# EAGLE board brushbot2.1 (EAGLE 9.4.2)
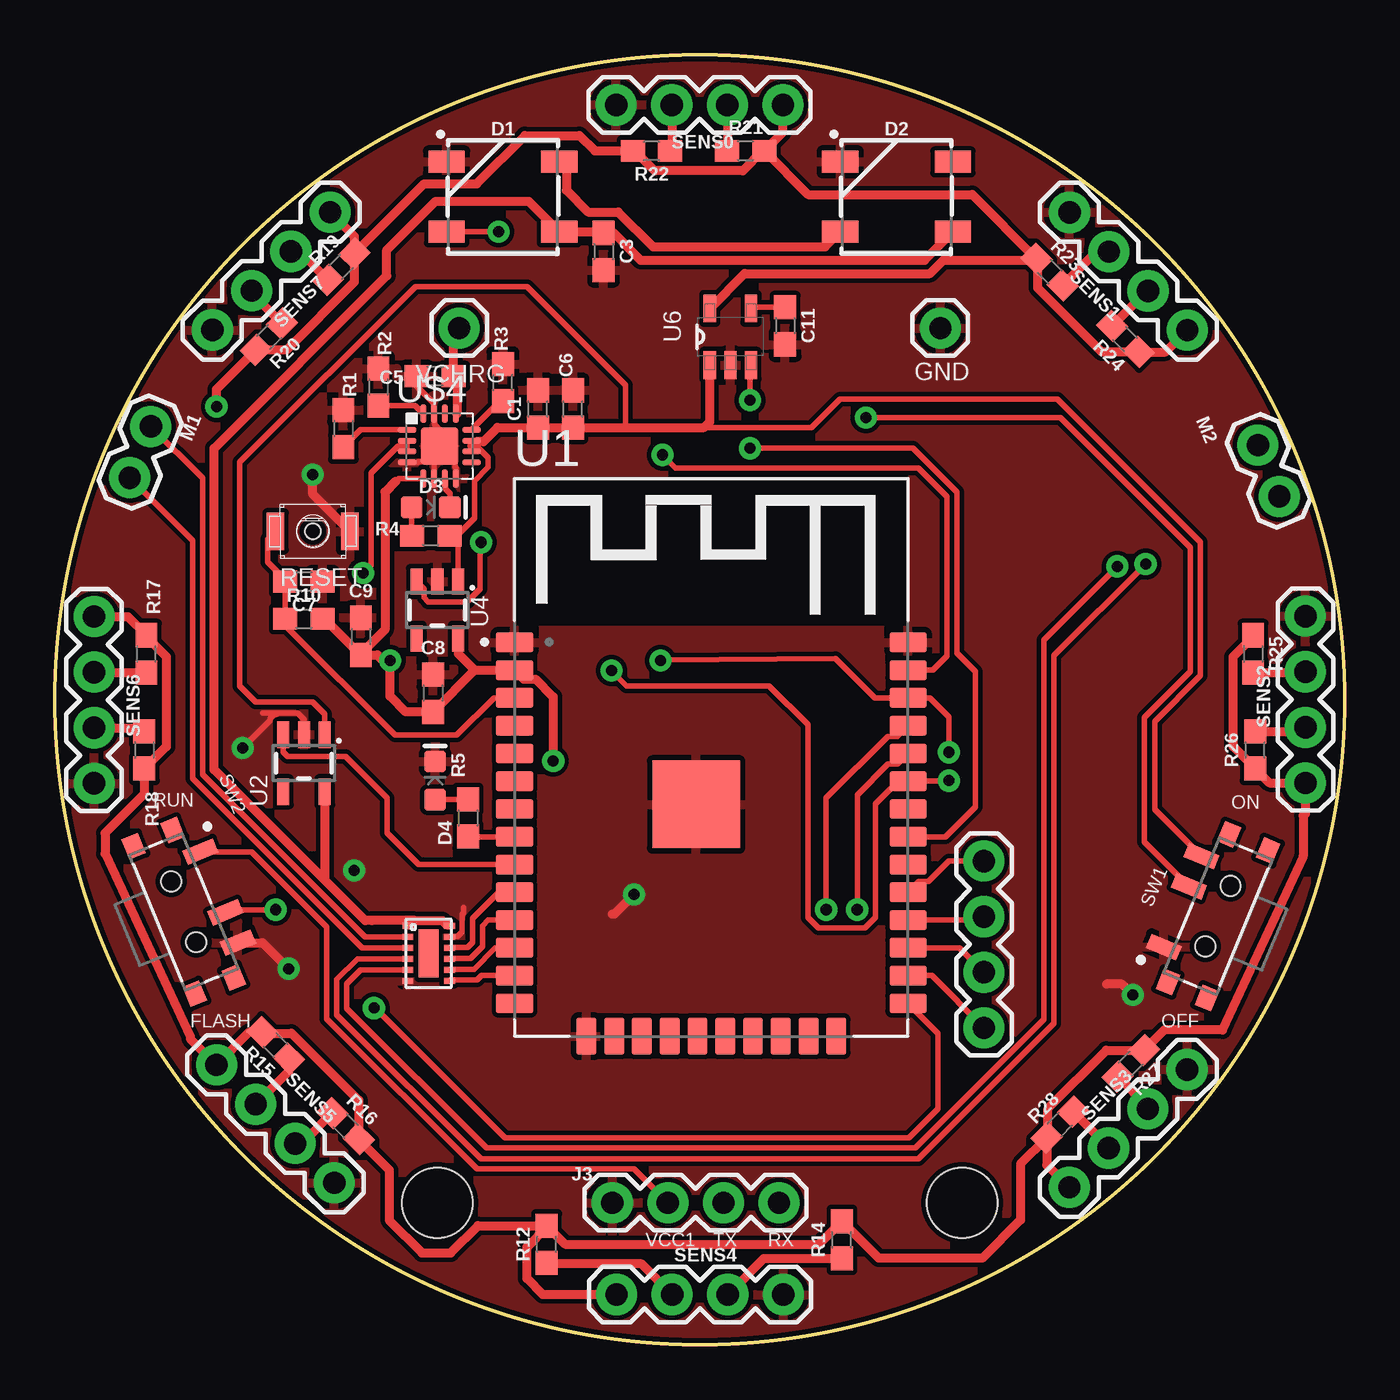
[diagram p0: board, top side]
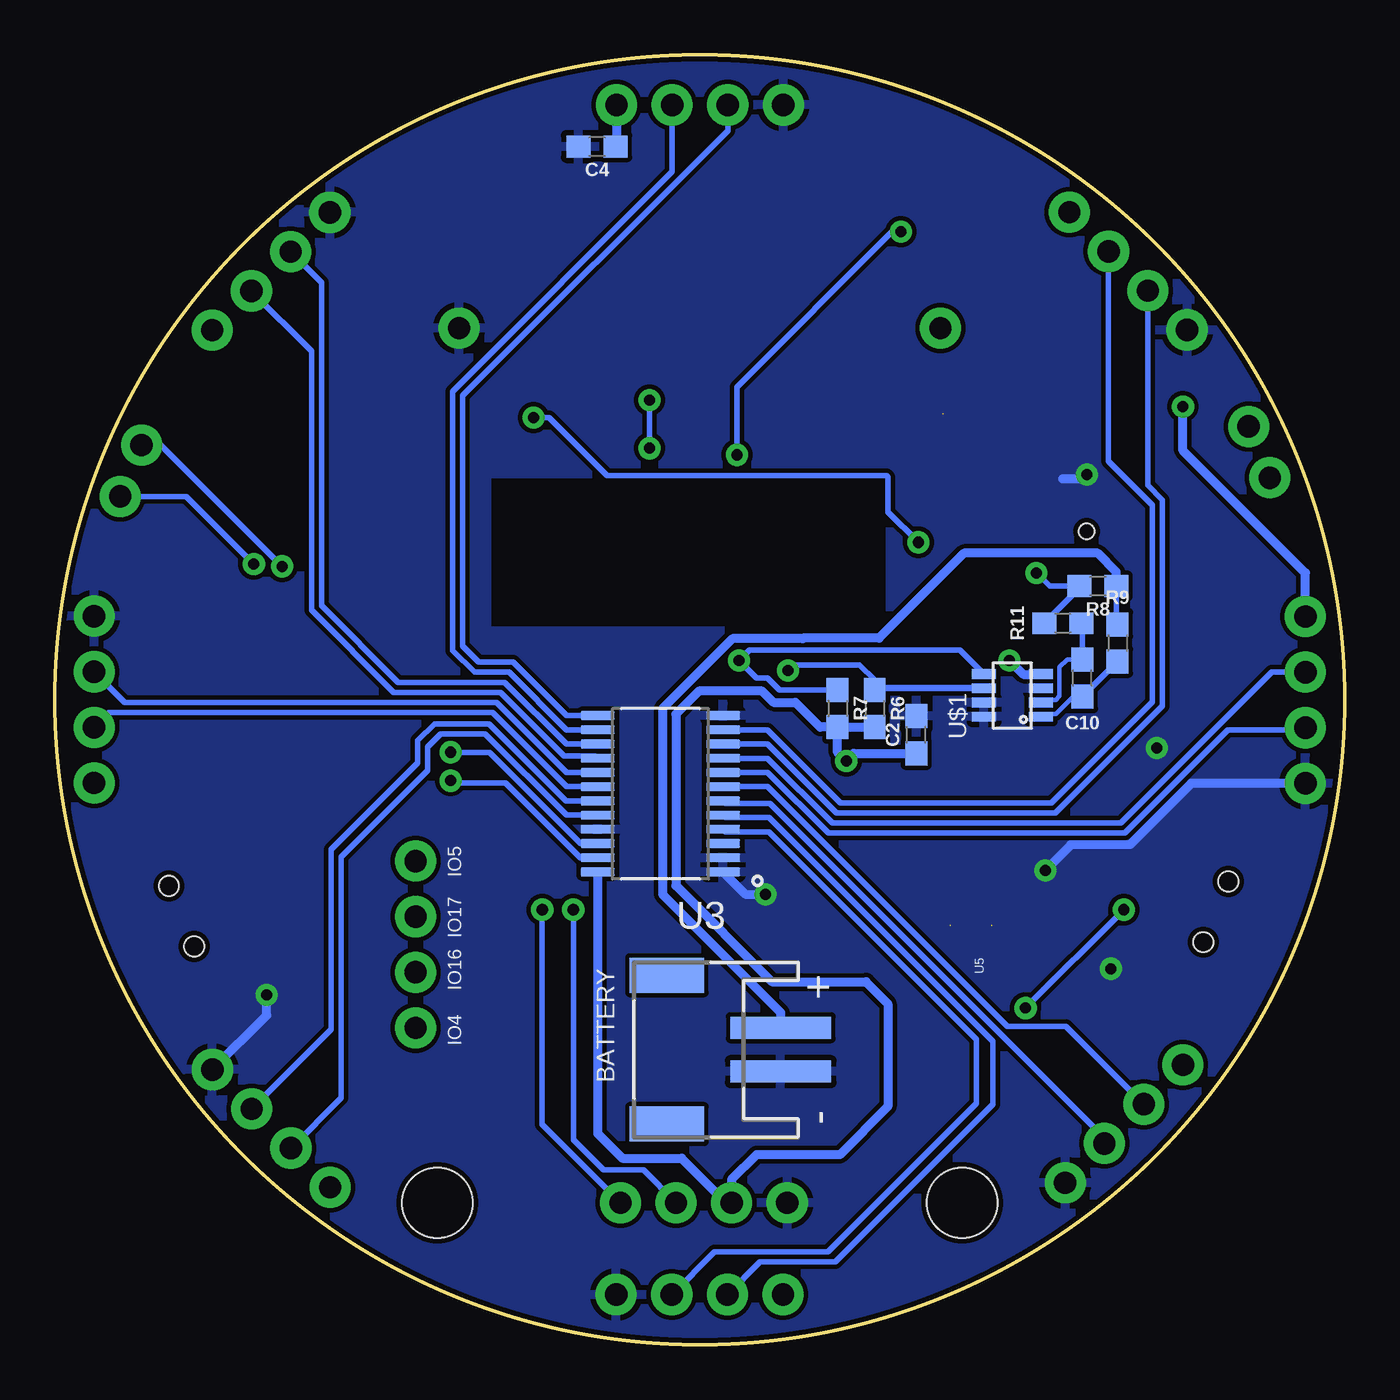
[diagram p1: board, bottom side, seen from below]

Size 59 x 59 mm. Coordinates in mm from the lower left corner, seen from the top.
Outline: circle at 29.5,29.5 radius 29.5
Copper layers (1*16): Top 0.035mm / dielectric 1.5mm / Bottom 0.035mm
Design rules "SparkFun": minimum track width 8mil, minimum drill 20mil, track to track 8mil, track to pad 8mil, pad to pad 8mil, via to via 8mil, smd to smd 8mil, copper to edge 10mil, drill to drill 8mil, minimum pad ring 12mil, minimum via ring 10mil, stop-mask expansion 4mil, vias tented up to drill 25mil, thermal gap 10mil
Holes 3.2 mm at 41.5,6.5 17.5,6.5

## Footprints (pad centres in the part's own frame; a part is rotated, then mirrored left to right if it is on the bottom)
0603 = smd 1.1 x 1: 1 -0.85,0; 2 0.85,0
JST-PH-2-SMT-RA = smd 1 x 4.6: 1 1,-3.7; 2 -1,-3.7 | smd 1.6 x 3.4: NC1 -3.4,1.5; NC2 3.4,1.5
WS2812B = smd 1.651 x 1: 1 2.577,-1.6; 2 2.577,1.6; 3 -2.577,1.6; 4 -2.577,-1.6
LED-0603 = smd 1 x 1: A -0.877,0; C 0.877,0
1X04 = drill 1.016 pad 1.88: 1 0,0; 2 2.54,0; 3 5.08,0; 4 7.62,0
1X01 = drill 1.016 pad 1.88: 1 0,0
1X02 = drill 1.016 pad 1.88: 1 0,0; 2 2.54,0
BUTTON_TACTILE_SLIM = smd 0.8 x 1.7: 1 -1.7,0; 2 1.7,0 | hole 0.7: 0,0
SW_PCM12SMTR = smd 0.7 x 1.5: 1 -2.25,1.75; 2 0.75,1.75; 3 2.25,1.75 | smd 1 x 0.8: S1 -3.65,0.965; S2 -3.65,-0.965; S3 3.65,-0.965; S4 3.65,0.965 | hole 0.9: -1.5,0; 1.5,0
MODULE_ESP-WROOM-32 = smd 1.7 x 0.9: 1 -9,8.255; 2 -9,6.985; 3 -9,5.715; 4 -9,4.445; 5 -9,3.175; 6 -9,1.905; 7 -9,0.635; 8 -9,-0.635; 9 -9,-1.905; 10 -9,-3.175; 11 -9,-4.445; 12 -9,-5.715; 13 -9,-6.985; 14 -9,-8.255; 25 9,-8.255; 26 9,-6.985; 27 9,-5.715; 28 9,-4.445; 29 9,-3.175; 30 9,-1.905; 31 9,-0.635; 32 9,0.635; 33 9,1.905; 34 9,3.175; 35 9,4.445; 36 9,5.715; 37 9,6.985; 38 9,8.255 | smd 4 x 4: 1.1 -0.7,0.845 | smd 0.9 x 1.7: 15 -5.715,-9.755; 16 -4.445,-9.755; 17 -3.175,-9.755; 18 -1.905,-9.755; 19 -0.635,-9.755; 20 0.635,-9.755; 21 1.905,-9.755; 22 3.175,-9.755; 23 4.445,-9.755; 24 5.715,-9.755
SOT23-5 = smd 0.55 x 1.2: 1 -0.95,-1.3; 2 0,-1.3; 3 0.95,-1.3; 4 0.95,1.3; 5 -0.95,1.3
SOP65P640X120-24N = smd 1.57 x 0.41: 1 -2.87,3.575; 2 -2.87,2.925; 3 -2.87,2.275; 4 -2.87,1.625; 5 -2.87,0.975; 6 -2.87,0.325; 7 -2.87,-0.325; 8 -2.87,-0.975; 9 -2.87,-1.625; 10 -2.87,-2.275; 11 -2.87,-2.925; 12 -2.87,-3.575; 13 2.87,-3.575; 14 2.87,-2.925; 15 2.87,-2.275; 16 2.87,-1.625; 17 2.87,-0.975; 18 2.87,-0.325; 19 2.87,0.325; 20 2.87,0.975; 21 2.87,1.625; 22 2.87,2.275; 23 2.87,2.925; 24 2.87,3.575
12WSON = smd 0.28 x 0.5: 1 -1.25,-0.95; 2 -0.75,-0.95; 3 -0.25,-0.95; 4 0.25,-0.95; 5 0.75,-0.95; 6 1.25,-0.95; 7 1.25,0.95; 8 0.75,0.95; 9 0.25,0.95; 10 -0.25,0.95; 11 -0.75,0.95; 12 -1.25,0.95 | smd 2.2 x 0.9: TH 0,0
SOT95P280X145-5N = smd 1.27 x 0.559: 1 -1.295,0.94; 2 -1.295,0; 3 -1.295,-0.94; 4 1.295,-0.94; 5 1.295,0.94
SOT-23-8 = smd 0.45 x 1.1: 1 -0.975,-1.3; 2 -0.325,-1.3; 3 0.325,-1.3; 4 0.975,-1.3; 5 0.975,1.3; 6 0.325,1.3; 7 -0.325,1.3; 8 -0.975,1.3
QFN16 = smd 0.85 x 0.28: 1 -1.475,0.75; 2 -1.475,0.25; 3 -1.475,-0.25; 4 -1.475,-0.75; 9 1.475,-0.75; 10 1.475,-0.25; 11 1.475,0.25; 12 1.475,0.75 | smd 0.28 x 0.85: 5 -0.75,-1.475; 6 -0.25,-1.475; 7 0.25,-1.475; 8 0.75,-1.475; 13 0.75,1.475; 14 0.25,1.475; 15 -0.25,1.475; 16 -0.75,1.475 | smd 1.7 x 1.7: TH 0,0

## Placement (x,y rotation side)
C1  1.0uF  [0603]  22.1,42.8 90 top
C2  1.0uF  [0603]  19.6,27.9 90 bottom
C3  1.0uF  [0603]  25.1,50 270 top
C4  10uF  [0603]  34.2,54.8 180 bottom
C5  1.0uF  [0603]  17.4,44.3 180 top
C6  4.7uF  [0603]  23.7,42.8 90 top
C7  0.1uF  [0603]  11.4,34.9 180 top
C8  0.1uF  [0603]  17.3,29.8 270 top
C9  0.1uF  [0603]  14,32.4 270 top
C10  0.1uF  [0603]  12,30.5 90 bottom
C11  10nF  [0603]  33.4,46.6 270 top
CN1  [JST-PH-2-SMT-RA]  29.5,13.5 90 bottom
D1  WS2812B  [WS2812B]  20.5,52.5 0 top
D2  WS2812B  [WS2812B]  38.5,52.5 0 top
D3  RED  [LED-0603]  17.2,38.3 0 top
D4  RED  [LED-0603]  17.4,25.8 90 top
FRAME2  FRAME-LEDGER  [CREATIVE_COMMONS]  -41.5,-31.5 0 top  (outside the outline)
J3  [1X04]  25.5,6.5 0 top
J4  [1X01]  18.5,46.5 0 top
J5  [1X01]  40.5,46.5 0 top
J12  [1X04]  42.5,14.5 90 top
M1  [1X02]  4.4,42 247.5 top
M2  [1X02]  56,38.8 112.5 top
R1  10k  [0603]  13.2,41.9 270 top
R2  1.8k  [0603]  14.8,43.8 270 top
R3  1k  [0603]  20.5,44 90 top
R4  1k  [0603]  17.2,37 0 top
R5  47k  [0603]  18.9,24.1 270 top
R6  4.7k  [0603]  21.5,29.1 270 bottom
R7  4.7k  [0603]  23.2,29.1 270 bottom
R8  0.05  [0603]  11.3,34.7 180 bottom
R9  10  [0603]  10.4,32.1 270 bottom
R10  10k  [0603]  11.4,33.2 0 top
R11  10  [0603]  12.9,33 0 bottom
R12  4.7k  [0603]  22.5,4.6 90 top
R14  4.7k  [0603]  36,4.8 90 top
R15  4.7k  [0603]  10.1,13.7 135 top
R16  4.7k  [0603]  13.3,10 315 top
R17  4.7k  [0603]  4.2,31.6 90 top
R18  4.7k  [0603]  4.1,27.2 270 top
R19  4.7k  [0603]  13.1,49.3 45 top
R20  4.7k  [0603]  9.8,46.1 225 top
R21  4.7k  [0603]  31.6,54.6 0 top
R22  4.7k  [0603]  27.3,54.6 180 top
R23  4.7k  [0603]  45.5,49.06 315 top
R24  4.7k  [0603]  48.96,46 135 top
R25  4.7k  [0603]  54.8,31.6 270 top
R26  4.7k  [0603]  54.9,27.2 90 top
R27  4.7k  [0603]  49.21,12.87 225 top
R28  4.7k  [0603]  45.97,10.07 45 top
RST_BUTTON  BUTTON_TACTILE_SLIM  [BUTTON_TACTILE_SLIM]  11.8,37.2 0 top
SENS0  [1X04]  33.3,56.7 180 top
SENS1  [1X04]  51.8,46.4 135 top
SENS2  [1X04]  57.2,25.7 90 top
SENS3  [1X04]  46.4,7.2 45 top
SENS4  [1X04]  25.7,2.3 0 top
SENS5  [1X04]  7.4,12.8 315 top
SENS6  [1X04]  1.8,33.3 270 top
SENS7  [1X04]  12.6,51.8 225 top
SW1  PCM12SMTR  [SW_PCM12SMTR]  53.2,19.6 67.5 top
SW2  PCM12SMTR  [SW_PCM12SMTR]  5.9,19.8 292.5 top
U1  ESP-WROOM-32  [MODULE_ESP-WROOM-32]  30.03,23.87 0 top
U2  3.3V  [SOT23-5]  11.4,26.6 180 top
U3  TCA9548APWR  [SOP65P640X120-24N]  31.3,25.2 180 bottom
U4  3.3V  [SOT23-5]  17.5,33.6 180 top
U5  DRV8836  [12WSON]  17.1,17.9 270 top
U6  TPS79328DBVR  [SOT95P280X145-5N]  30.9,46.1 90 top
U$1  INA219  [SOT-23-8]  15.2,29.7 90 bottom
U$4  BQ24075  [QFN16]  17.6,41.1 0 top

## Library data of the parts
C1-C3 C5 = SparkFun-Capacitors; PROD_ID: CAP-00868
C4 = SparkFun-Capacitors; PROD_ID: CAP-11015
C6 = SparkFun-Capacitors; PROD_ID: CAP-08280
C7-C10 = SparkFun-Capacitors; PROD_ID: CAP-00810
C11 = SparkFun-Capacitors; PROD_ID: CAP-00867
CN1 = adafruit
D1 D2 = SparkFun-LED; PROD_ID: DIO-12503
D3 D4 = SparkFun-LED; PROD_ID: DIO-00819
FRAME2 RST_BUTTON U$1 = GRITSBot
J3 J12 SENS0 SENS1-SENS7 = SparkFun-Connectors; PROD_ID: CONN-09696
J4 J5 M1 M2 = SparkFun-Connectors
R1 R10 = SparkFun-Resistors; PROD_ID: RES-00824
R2 = SparkFun-Resistors; PROD_ID: RES-09119
R3 R4 = SparkFun-Resistors; PROD_ID: RES-07856
R5 = SparkFun-Resistors; PROD_ID: RES-07871
R6 R7 R12 R14-R28 = SparkFun-Resistors; PROD_ID: RES-07857
R8 = SparkFun-Resistors; PROD_ID: RES-12535
R9 R11 = SparkFun-Resistors; PROD_ID: RES-12581
SW1 SW2 = PCM12SMTR; AVAILABILITY: Unavailable; DESCRIPTION: Switch Slide ON ON SPDT Side Slide 0.3A 6VDC 10000Cycles Gull Wing SMD T/R; MF: C&K; MP: PCM12SMTR; PACKAGE: DO-201 C&amp;K Components; PRICE: None
U1 = ESP-WROOM-32; DESCRIPTION: Module: combo; GPIO, I2C x2, I2S x2, SDIO, SPI x3, UART x3; 19.5dBm; DIGI-KEY_PART_NUMBER: 1188-1178-ND; DIGI-KEY_PURCHASE_URL: https://www.digikey.com/product-detail/en/olimex-ltd/ESP-WROOM-32/1188-1178-ND/6580750?utm_source=snapeda&utm_medium=aggregator&utm_campaign=symbol; MF: Olimex LTD; MP: ESP-WROOM-32; PACKAGE: Module Olimex LTD
U2 U4 = SparkFun-IC-Power; PROD_ID: VREG-12457
U3 = TCA9548APWR; AVAILABILITY: Unavailable; DESCRIPTION: Low-Voltage 8-Channel I2C Switch With Reset 24-TSSOP -40 to 85; MF: Texas Instruments; MP: TCA9548APWR; PACKAGE: TSSOP-24 Texas Instruments; PRICE: None
U5 = balto
U6 = TPS79328DBVR; AVAILABILITY: Unavailable; DESCRIPTION: Single Output LDO, 200mA, Fixed_2.8V_, High PSRR, Low Noise 5-SOT-23 -40 to 125; MF: Texas Instruments; MP: TPS79328DBVR; PACKAGE: SOT-23-5 Texas Instruments; PRICE: None
U$4 = TI-bq24075

## Nets
26: J12.1 U1.26
27: J12.2 U1.27
28: J12.3 U1.28
29: J12.4 U1.29
AIN1: U1.10 U5.10
AIN2: U1.11 U5.9
BIN1: U1.12 U5.8
BIN2: U1.13 U5.7
GND: C1.2 C2.2 C3.2 C4.2 C5.2 C6.2 C7.1 C8.1 C9.1 C11.2 CN1.2 D1.3 D2.3 D4.C J3.1 J5.1 R1.1 R2.1 R3.2 RST_BUTTON.2 SENS0.4 SENS1.4 SENS2.4 SENS3.4 SENS4.4 SENS5.4 SENS6.4 SENS7.4 SW1.1 SW2.3 U1.1 U1.1.1 U1.15 U1.38 U2.2 U3.1 U3.2 U3.12 U3.21 U4.2 U5.6 U5.11 U6.2 U$1.3 U$1.7 U$1.8 U$4.4 U$4.6 U$4.8 U$4.15 U$4.TH
GPIO0: SW2.2 U1.25
LED1OUT: D1.2 D2.4
LEDS: D1.4 U1.37
M1+: M1.1 U5.2
M1-: M1.2 U5.3
M2+: M2.1 U5.4
M2-: M2.2 U5.5
MOTOR_EN: U1.9 U2.3
N$1: R1.2 U$4.1
N$2: SW1.2 U4.3
N$3: R2.2 U$4.16
N$4: R3.1 U$4.12
N$5: C10.1 R9.2 U$1.1
N$7: D3.C U$4.7
N$8: D3.A R4.1
N$9: R5.2 U1.8
N$10: D4.A R5.1
N$11: C10.2 R11.2 U$1.2
N$12: CN1.1 R8.1 R9.1
N$14: C11.1 U6.4
N$15: U3.3
OLD_MOTOR_EN: U1.30
RESET: C7.2 R10.1 RST_BUTTON.1 U1.3
SCL1: R7.1 U1.36 U3.22 U$1.5
SCL1_0: R21.1 SENS0.2 U3.14
SCL1_1: R24.2 SENS1.2 U3.16
SCL1_2: R26.2 SENS2.2 U3.18
SCL1_3: R28.2 SENS3.2 U3.20
SCL1_4: R12.1 SENS4.2 U3.5
SCL1_5: R15.1 SENS5.2 U3.7
SCL1_6: R17.1 SENS6.2 U3.9
SCL1_7: R19.1 SENS7.2 U3.11
SDA1: R6.1 U1.33 U3.23 U$1.6
SDA1_0: R22.1 SENS0.3 U3.13
SDA1_1: R23.2 SENS1.3 U3.15
SDA1_2: R25.2 SENS2.3 U3.17
SDA1_3: R27.2 SENS3.3 U3.19
SDA1_4: R14.1 SENS4.3 U3.4
SDA1_5: R16.1 SENS5.3 U3.6
SDA1_6: R18.1 SENS6.3 U3.8
SDA1_7: R20.1 SENS7.3 U3.10
SENS_EN: U1.31 U6.3
U0RX: J3.4 U1.34
U0TX: J3.3 U1.35
V_SUP: C1.1 C6.1 R4.2 SW1.3 U2.1 U4.1 U6.1 U$4.10 U$4.11
VBAT: R8.2 R11.1 U$4.2 U$4.3
VCC1: C2.1 C8.2 C9.2 J3.2 R6.2 R7.2 R10.2 SW2.1 U1.2 U3.24 U4.5 U$1.4 U$4.5
VCC2: C3.1 D1.1 D2.1 U2.5 U5.1 U5.12
VCC3: C4.1 R12.2 R14.2 R15.2 R16.2 R17.2 R18.2 R19.2 R20.2 R21.2 R22.2 R23.1 R24.1 R25.1 R26.1 R27.1 R28.1 SENS0.1 SENS1.1 SENS2.1 SENS3.1 SENS4.1 SENS5.1 SENS6.1 SENS7.1 U6.5
VCHRG: C5.1 J4.1 U$4.13

## Tracks (layer width: path | path; a pad name or v marks a point on that pad's centre or on a via)
26
  Top 0.254: U1.26 40.12,16.88 J12.1
27
  Top 0.254: U1.27 41.38,18.16 J12.2
28
  Top 0.254: U1.28 42.34,19.42 J12.3
29
  Top 0.254: U1.29 39.52,21.19 39.96,21.19 40.89,22.12 J12.4
AIN1
  Top 0.254: U5.10 18.08,18.18 18.88,18.18 19.1,18.4 19.1,19.5 20.3,20.7 U1.10
AIN2
  Top 0.254: U5.9 18.08,17.68 19.03,17.68 19.56,18.21 19.56,19.16 19.83,19.42 U1.11 20.52,19.42
BIN1
  Top 0.254: U5.8 18.08,17.18 19.17,17.18 20.15,18.16 U1.12
BIN2
  Top 0.254: U1.13 19.52,16.88 19.32,16.68 18.08,16.68 U5.7
GND  (via drill 0.51)
  Top 0.254: U$4.4 16.6,40.35 16.63,40.38 16.88,40.38 17.35,40.85 | U$4.6 17.35,40.85 | 17.35,40.85 17.5,41 | 17.5,41 U$4.TH 18.32,40.38 18.32,40.13 18.35,40.1 U$4.8 | 17.5,41 17.5,41.95 17.38,42.08 17.38,42.55 U$4.15 17.32,42.6 17.32,43.08 16.55,43.84 C5.2 | U2.2 11.4,28.6 11.1,28.9 10.2,28.9 | 10.2,28.9 9.5,28.9 | U5.11 18.08,18.68 18.44,18.68 18.64,18.89 18.64,19.69 18.7,19.75 18.7,20 | 10.2,28.9 10.13,28.83 10.04,28.83 9.84,28.64 9.84,28.55 v8.6,27.3
  Top 0.406: v26.5,20.6 25.6,19.7 25.5,19.7 | RST_BUTTON.2 11.8,38.9 v11.8,39.8 | v49.3,16 48.8,16.5 48.1,16.5 | SW2.3 9.51,18.39 v10.7,17.2
  Bottom 0.406: U3.1 27.41,20.6 v26.5,20.6 | v11.8,39.8 12,39.6 12.9,39.6 | SENS3.4 49.3,15.08 v49.3,16 | SENS6.4 7.03,25.68 9.84,22.87 12.54,22.87 v13.7,21.7
  pour Top: -8.5,60.5 69.5,60.5 69.5,-3.5 -9.5,-3.5 -9.5,60.5
  pour Bottom: -9.5,60.5 69.5,60.5 69.5,-3.5 -9.5,-3.5
GPIO0  (via drill 0.51)
  Top 0.254: U1.25 40.4,14.25 40.4,10.8 39.06,9.46 20.6,9.46 14.66,15.4 v14.6,15.4 | v10.1,19.9 7.93,19.9 SW2.2
  Bottom 0.254: v14.6,15.4 v10.1,19.9
LED1OUT
  Top 0.406: D1.2 23.4,53.78 23.4,52.8 24.39,51.81 25.77,51.81 27.37,50.21 35.23,50.21 D2.4
LEDS  (via drill 0.51)
  Top 0.254: U1.37 40.16,30.85 40.8,31.5 40.8,38.8 39.5,40.1 28.4,40.1 v27.8,40.7 | v20.3,50.9 D1.4
  Bottom 0.254: v27.8,40.7 27.8,43.8 20.7,50.9 v20.3,50.9
M1+
  Top 0.254: U5.2 14.2,18.65 6.76,26.09 6.76,39.64 M1.1
M1-
  Top 0.254: U5.3 14.05,18.15 6.3,25.9 6.3,36.78 M1.2
M2+  (via drill 0.51)
  Top 0.254: U5.4 13.85,17.65 12.9,16.7 12.9,15.1 19.5,8.5 39.5,8.5 45.7,14.7 45.7,31.52 v49.89,35.71
  Bottom 0.254: v49.89,35.71 52.98,38.8 M2.1
M2-  (via drill 0.51)
  Top 0.254: v48.6,35.6 45.24,32.24 45.24,14.89 39.35,9 19.75,9 13.36,15.39 13.36,16.51 14,17.15 U5.5
  Bottom 0.254: v48.6,35.6 54.15,41.15 M2.2
MOTOR_EN
  Top 0.254: U1.9 16.63,21.97 15.2,23.4 15.2,25 13.3,26.9 10.65,26.9 10.45,27.1 U2.3
N$1
  Top 0.254: U$4.1 14,41.85 R1.2
N$2  (via drill 0.51)
  Top 0.254: U4.3 16.9,34.55 16.9,34.16 17.09,33.97 18.86,33.97 19.45,34.56 19.45,36.66 v19.5,36.7 | v37.1,42.4 46,42.4 51.94,36.46 51.94,30.79 49.84,28.69 49.84,22.99 SW1.2
  Bottom 0.254: v19.5,36.7 20.89,38.09 20.89,39.67 20.97,39.75 33.75,39.75 36.4,42.4 v37.1,42.4
N$3
  Top 0.254: R2.2 16.48,42.95 U$4.16
N$4
  Top 0.254: U$4.12 20.38,43.15 R3.1
N$5
  Bottom 0.203: U$1.1 13.78,28.84 13.22,28.84 12.42,29.65 C10.1
  Bottom 0.254: C10.1 R9.2
N$7
  Top 0.254: 17.85,39.53 U$4.7 17.88,39.59 17.88,39.12 18.08,38.93 D3.C
N$8
  Top 0.254: D3.A 16.32,37.03 R4.1
N$9
  Top 0.254: U1.8 18.91,23.23 R5.2
N$10
  Top 0.254: D4.A 17.43,24.95 R5.1
N$11
  Bottom 0.203: U$1.2 13.78,29.49 13.22,29.49 13.05,29.67 13.05,31 12.7,31.35 C10.2
  Bottom 0.254: R11.2 12,32.95 C10.2
N$12
  Bottom 0.254: R9.1 10.45,32.95 R8.1
  Bottom 0.406: R8.1 10.45,35.35 11.3,36.2 17.41,36.2 21.3,32.31 24.78,32.31 24.79,32.3 28,32.3 31.2,29.1 31.2,20.6 25.8,15.2 CN1.1
N$14
  Top 0.254: U6.4 31.89,47.45 C11.1
RESET
  Top 0.254: RST_BUTTON.1 9.75,36.85 9.75,35.8 10.55,35 C7.2 R10.1 10.55,32.9 15.57,27.88 18.38,27.88 20.09,29.59 U1.3
SCL1  (via drill 0.51)
  Top 0.254: v40.9,27.1 40.9,28.7 40.02,29.59 U1.36 37.52,29.59 35.71,31.39 27.72,31.32 v27.7,31.3
  Bottom 0.254: v40.9,27.1 39.12,27.1 34.95,22.92 U3.22 | U$1.5 17.6,31.77 27.23,31.77 v27.7,31.3 26.9,30.5 26.4,30.5 25.85,29.95 R7.1
SCL1_0
  Top 0.406: SENS0.2 R21.1
  Bottom 0.254: U3.14 35.6,28.12 38.23,30.76 39.8,30.76 40.8,31.76 40.8,33.33 40.8,33.6 40.8,43.6 30.76,53.64 SENS0.2
SCL1_1
  Top 0.406: R24.2 49.95,48.2 SENS1.2
  Bottom 0.254: U3.16 34.28,26.94 35.71,26.94 38.61,29.84 43.49,29.84 47.26,33.61 47.26,45.45 SENS1.2
SCL1_2
  Top 0.406: R26.2 57.01,28.05 SENS2.2
  Bottom 0.254: U3.18 35.59,25.52 38.98,28.92 56.52,28.92 SENS2.2
SCL1_3
  Top 0.406: R28.2 48.2,9.05 SENS3.2
  Bottom 0.254: SENS3.2 45.9,11.3 45.9,22.3 41.94,26.26 41.94,27.35 41.35,27.94 39.31,27.94 35.6,24.23 U3.20
SCL1_4
  Top 0.254: 22.35,3.6 R12.1
  Top 0.406: SENS4.2 26.84,3.7 22.55,3.7 R12.1
  Bottom 0.254: U3.5 28.31,24.11 26.34,24.11 16.1,13.87 16.1,11 23.3,3.8 26.74,3.8 SENS4.2
SCL1_5
  Top 0.406: R15.1 10.7,12.51 SENS5.2
  Bottom 0.254: U3.7 26.4,25.52 15.43,14.56 12.75,14.56 SENS5.2
SCL1_6
  Top 0.406: SENS6.2 R17.1
  Bottom 0.254: U3.9 26.4,26.83 23.43,23.85 10.25,23.85 3.35,30.76 SENS6.2
SCL1_7
  Top 0.406: R19.1 11.19,50 SENS7.2
  Bottom 0.254: U3.11 26.41,28.12 23.05,24.77 13.43,24.77 8.8,29.4 8.8,38.4 10.8,40.4 SENS7.2
SDA1  (via drill 0.51)
  Top 0.254: v40.9,25.8 40.88,25.77 U1.33 38.58,25.77 37.54,24.74 37.54,19.55 37.05,19.06 34.93,19.06 34.44,19.55 34.44,28.37 32.67,30.14 26.16,30.14 v25.46,30.84
  Bottom 0.254: v40.9,25.8 40.8,25.7 38.37,25.7 34.95,22.27 U3.23 | R6.1 21.5,29.9 | R6.1 21.5,30.04 | R6.1 21.5,30.4 22.2,31.1 25.2,31.1 v25.46,30.84
  Bottom 0.305: U$1.6 16.51,30.04 21.5,30.04
SDA1_0
  Top 0.406: SENS0.3 28.22,54.67 R22.1
  Bottom 0.254: SENS0.3 28.22,55.53 40.34,43.41 40.34,33.8 40.34,33.6 40.34,31.95 39.61,31.21 38.04,31.21 35.6,28.77 U3.13
SDA1_1
  Top 0.406: R23.2 47.64,49.99 SENS1.3
  Bottom 0.254: U3.15 35.6,27.48 38.42,30.3 43.3,30.3 46.8,33.8 46.8,48.58 SENS1.3
SDA1_2
  Top 0.406: R25.2 57.17,30.75 SENS2.3
  Bottom 0.254: U3.17 35.59,26.17 38.79,29.38 55.8,29.38 SENS2.3
SDA1_3
  Top 0.406: R27.2 49.99,10.89 SENS3.3
  Bottom 0.254: SENS3.3 46.35,14.43 46.35,22.65 42.4,26.6 42.4,27.64 41.64,28.4 39.12,28.4 35.6,24.88 U3.19
SDA1_4
  Top 0.406: SENS4.3 32.43,3.95 R14.1
  Bottom 0.254: U3.4 28.31,23.46 26.34,23.46 16.86,13.98 16.86,11.04 23.64,4.26 28.82,4.26 SENS4.3
SDA1_5
  Top 0.406: R16.1 11.31,9.21 SENS5.3
  Bottom 0.254: U3.6 28.31,24.76 26.28,24.76 10.99,9.47 SENS5.3
SDA1_6
  Top 0.406: SENS6.3 3.93,28.22 R18.1
  Bottom 0.254: U3.8 26.4,26.17 23.62,23.4 10.06,23.4 5.34,28.12 1.9,28.12 SENS6.3
SDA1_7
  Top 0.406: R20.1 9.01,48.09 SENS7.3
  Bottom 0.254: U3.10 26.41,27.48 23.24,24.31 13.24,24.31 8.34,29.21 8.34,38.64 9.01,39.31 SENS7.3
SENS_EN  (via drill 0.51)
  Top 0.254: U1.31 40.73,23.23 42.1,24.6 42.1,30.8 41.26,31.64 41.26,38.99 39.25,41 v31.8,41 | v31.8,43.2 31.8,44.77 U6.3
  Bottom 0.254: v31.8,41 v31.8,43.2
U0RX  (via drill 0.51)
  Top 0.254: U1.34 38.54,26.55 38.1,26.55 36.7,25.15 v36.7,19.9
  Bottom 0.254: J3.4 36.7,10.08 v36.7,19.9
U0TX  (via drill 0.51)
  Top 0.254: U1.35 38.54,27.83 38.1,27.83 35.28,25.01 v35.28,19.9
  Bottom 0.254: J3.3 32.08,8 33.9,8 35.28,9.38 v35.28,19.9
V_SUP
  Top 0.254: SW1.3 50.3,24.49 50.3,28.5 52.4,30.6 52.4,36.7 45.85,43.25 35.9,43.25 34.6,41.95 29.7,41.95 | U$4.10 19.08,41.1 U$4.11 | 12.35,28.08 U2.1 12.35,28.85 11.8,29.4 9.2,29.4 8.47,30.13 8.47,40.37 16.5,48.4 21.6,48.4 26.1,43.9 26.1,41.95 | 19.28,41.3 19.2,41.23 19.2,41.2 19.83,40.56 19.83,40.13 19.2,39.51 19.2,37.8 18.4,37 R4.2 18.45,36.6 U4.1
  Top 0.406: 19.08,41.1 19.28,41.3 19.61,41.3 20.25,41.95 C1.1 C6.1 26.1,41.95 29.7,41.95 29.96,42.21 U6.1
VBAT  (via drill 0.51)
  Top 0.254: U$4.2 16.12,41.1 | 16.12,41.1 U$4.3 | 16.12,41.1 15.7,41.1 14.47,39.87 14.47,35.67 v14.1,35.3
  Bottom 0.254: R11.1 12.15,34.6 R8.2 13.5,34.7 v14.1,35.3
VCC1  (via drill 0.51)
  Top 0.254: J3.2 26.5,8.04 19.31,8.04 12.44,14.91 12.44,19.11 9,22.55 SW2.1 | U$4.5 15.73,39.62 15.6,39.5
  Top 0.406: 14.05,31.55 C9.2 12.35,33.2 R10.2 12.5,33.2 | 14.05,31.55 14.75,31.55 15,31.3 v15.34,31.3 15.34,29.66 16.05,28.95 C8.2 | v22.8,26.7 22.8,29.63 21.99,30.44 21.44,30.44 U1.2 19.2,30.85 | C8.2 19.2,30.85 | 15.6,39.5 15.1,39 15.1,32.7 14,31.6 14.05,31.55 | U4.5 18.45,31.61 19.2,30.85 | C8.2 16.75,28.95
  Bottom 0.254: 28.78,6.5 28.3,6.5 J3.2
  Bottom 0.406: C2.1 22.45,27.05 v22.8,26.7 23.2,27.1 R7.2 | R7.2 23.1,28.15 | R7.2 24,28.25 25.12,29.38 26.12,29.38 26.65,29.9 29.54,29.9 30.59,28.85 30.59,21 26.19,16.6 21.9,16.6 20.9,15.6 20.9,10.9 23.1,8.7 26.9,8.7 28.04,7.56 J3.2 | U$1.4 13.92,30.66 14.7,30.66 v15.34,31.3 | U3.24 34.17,9.67 33.03,8.53 30.33,8.53 28.3,6.5 | R7.2 R6.2
VCC2  (2 unrouted)
  Top 0.406: 16.32,19.32 16.2,19.2 | 16.2,19.2 16.15,19.2 | 16.2,19.2 16.27,19.2 16.48,19.41 | 16.48,19.41 17.72,19.41 17.91,19.21 18.05,19.21 | 16.48,19.41 14.51,19.41 14.5,19.4 14.2,19.4 12.35,21.25 | 12.35,21.25 7.29,26.31 7.29,40.99 15.19,48.89 15.19,50.07 17.42,52.3 21.68,52.3 D1.1 25.05,50.9 C3.1 25.55,50.85 26.8,49.6 39.78,49.6 D2.1 | U2.5 12.35,21.25
VCC3  (via drill 0.51)
  Top 0.406: SENS7.1 13.7,50.7 R19.2 | R19.2 13.7,48.6 10.6,45.5 R20.2 7.4,43.7 v7.4,42.9 | R21.2 33.3,55.45 SENS0.1 | R21.2 32.38,54.6 31.47,53.69 27.43,53.69 26.52,54.6 R22.2 24.7,54.6 24,55.3 21.5,55.3 19.3,53.1 16.9,53.1 R19.2 | SENS1.1 50.8,45.4 R24.1 47.88,45.4 44.95,48.33 44.95,49.61 | 44.95,49.61 R23.1 41.96,52.6 34.45,52.6 R21.2 | R25.1 54.8,32.38 53.89,31.47 53.89,27.36 R26.1 55.55,25.7 SENS2.1 57.2,24.3 57.1,24.2 57.1,22.34 53.4,14.4 50.74,14.4 R27.1 48.09,13.47 45.42,10.8 45.42,9.52 R28.1 | R28.1 45.37,8.23 SENS3.1 | R12.2 22.5,5.38 21.59,4.47 21.59,3.03 22.33,2.3 SENS4.1 | R12.2 23.35,4.6 34.95,4.6 R14.2 37.68,3.97 42.42,3.97 44.17,5.71 44.17,8.27 R28.1 | SENS6.1 3.35,33.3 R17.2 4.2,32.38 5.11,31.47 5.11,27.36 R18.2 4.1,25.2 2.3,23.4 2.3,22.46 6.2,14.1 6.2,14 SENS5.1 8.9,14.3 R15.2 9.55,14.25 10.83,14.25 13.9,11.18 R16.2 15.3,8 15.3,5.7 16.8,4.2 18.11,4.2 19.36,5.45 R12.2 | U6.5 31.55,48.99 40.03,48.99 40.65,49.61 44.95,49.61
  Bottom 0.406: SENS6.1 1.8,35.3 7.4,40.9 v7.4,42.9 | SENS0.1 33.3,54.85 C4.1
VCHRG  (1 unrouted)
  Top 0.406: J4.1 18.25,46.25 C5.1 18.4,44.15 18.4,42.58

## Text on the board
tPlace: VCHRG | GND | RESET | RUN | ON | FLASH | OFF | VCC1 | TX | RX
bPlace: IO5 | IO17 | IO16 | IO4 | BATTERY